# EAGLE board controlsboardfile (EAGLE 9.6.2)
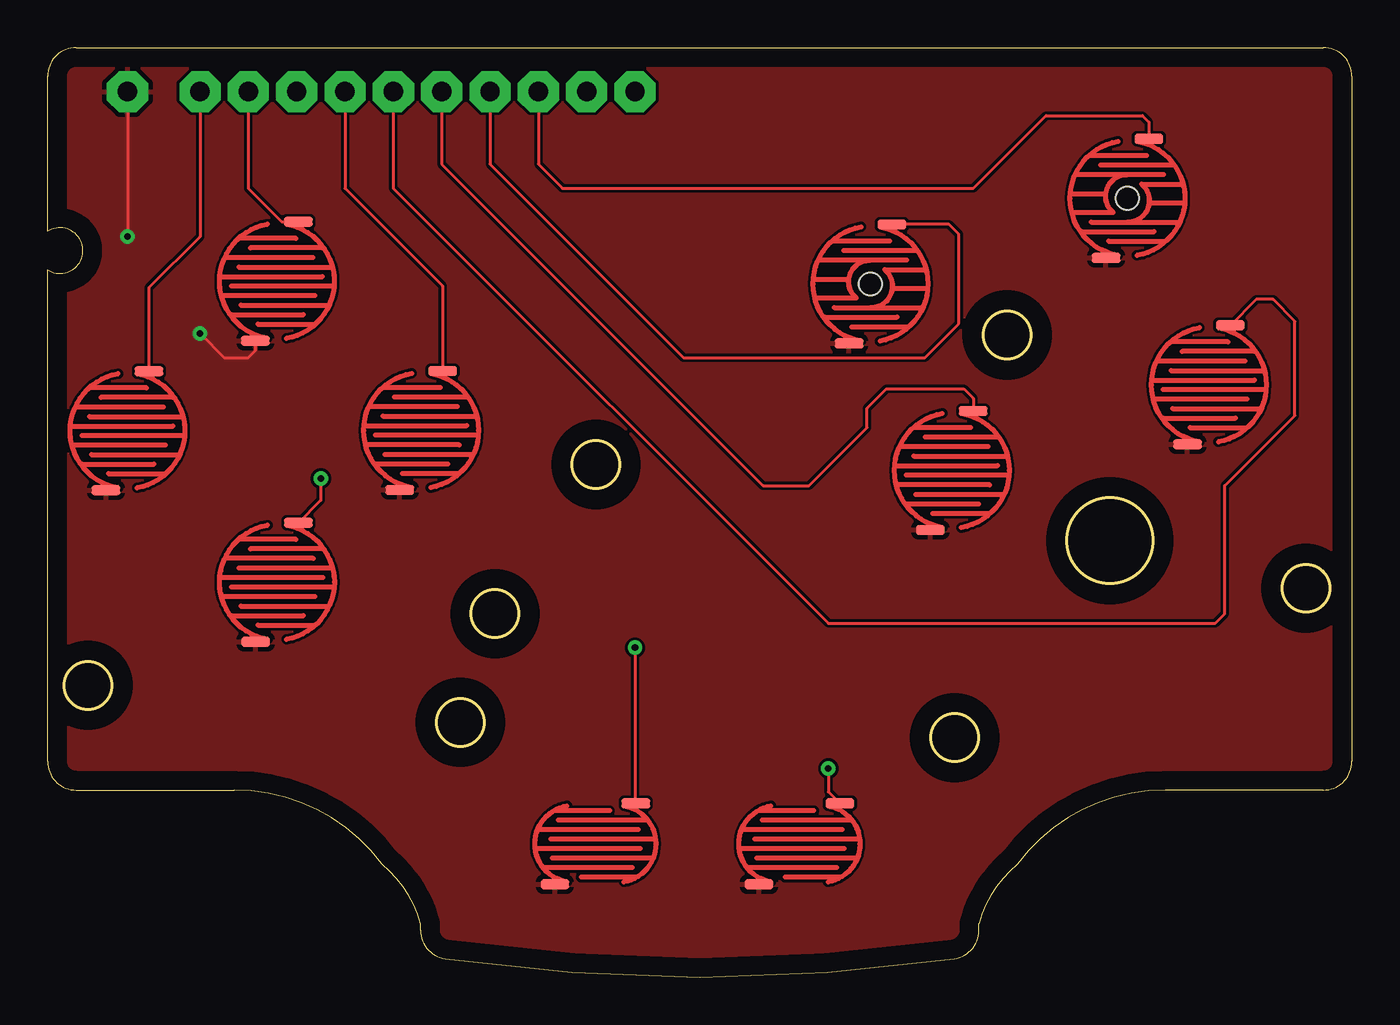
[diagram p0: board, top side]
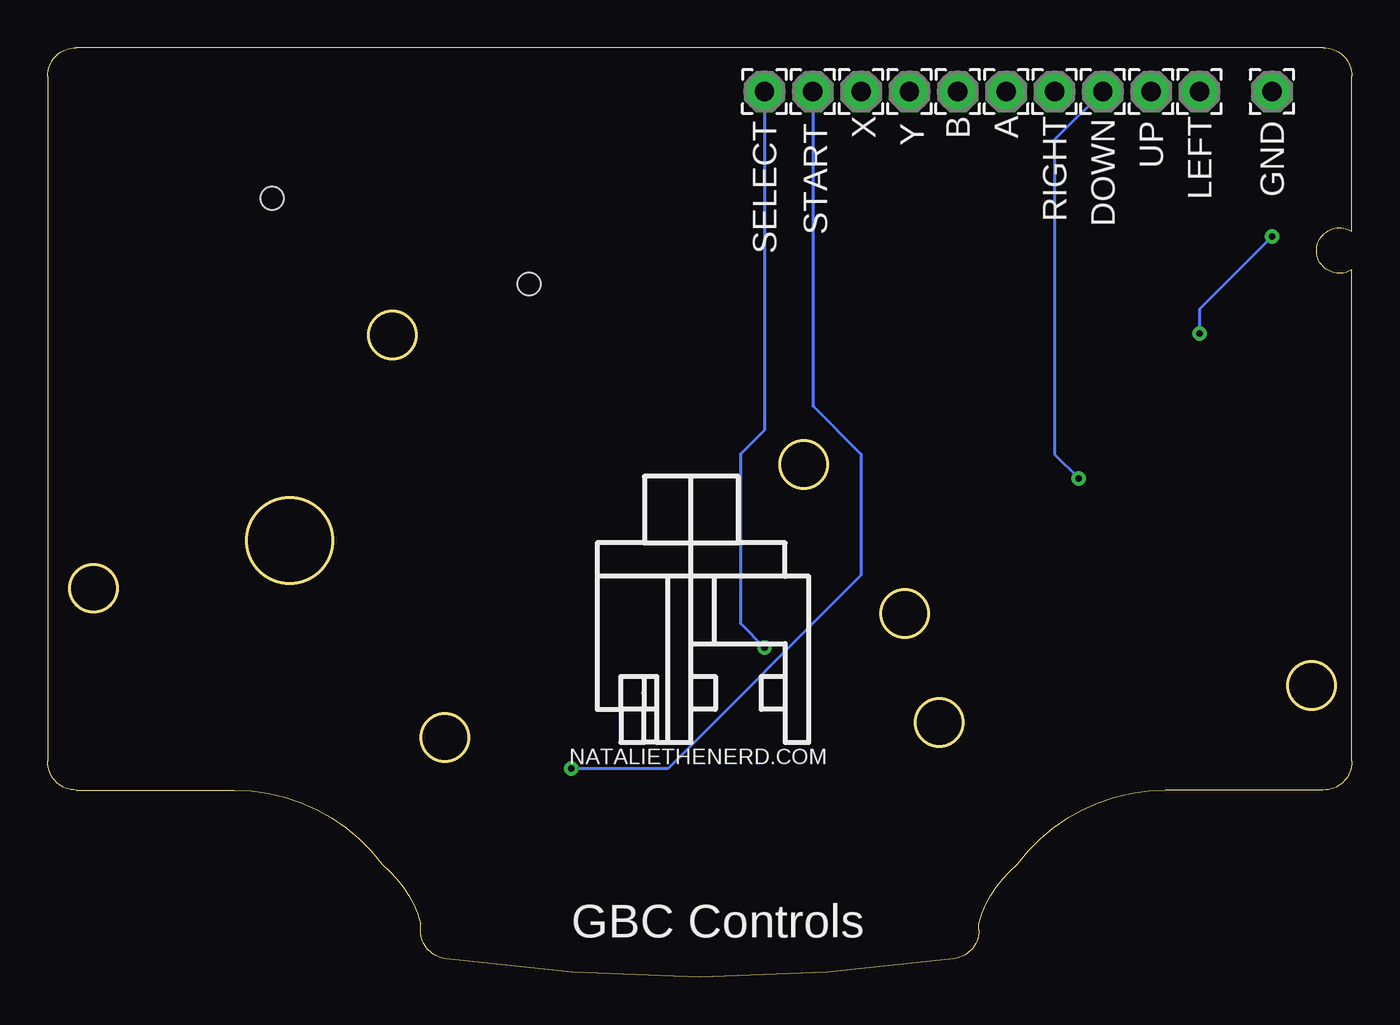
[diagram p1: board, bottom side, seen from below]

Size 68.54 x 48.82 mm. Coordinates in mm from the lower left corner, seen from the top.
Outline: 0,37.15 arc246 0,39.16 0,47.32 arc-90 1.5,48.82 67.04,48.82 arc-90 68.54,47.32 68.54,11.32 arc-90 67.04,9.82 58.73,9.82 arc53 50.96,5.93 arc34 48.94,2.8 48.94,2.45 arc-82 47.65,0.96 arc-16 20.89,0.96 arc-82 19.6,2.45 19.6,2.8 arc34 17.58,5.93 arc53 9.81,9.82 1.5,9.82 arc-90 0,11.32 0,37.15
Outline: circle at 47.67,12.57 radius 1.25
Outline: circle at 28.82,26.92 radius 1.25
Outline: circle at 2.12,15.32 radius 1.25
Outline: circle at 23.51,19.09 radius 1.25
Outline: circle at 50.42,33.72 radius 1.25
Outline: circle at 21.69,13.38 radius 1.25
Outline: circle at 55.82,22.92 radius 2.25
Outline: circle at 66.12,20.42 radius 1.25
Copper layers (1*16): Top 0.035mm / dielectric 1.5mm / Bottom 0.035mm
Design rules "default": minimum track width 6mil, minimum drill 0.35mm, track to track 6mil, track to pad 6mil, pad to pad 6mil, via to via 6mil, smd to smd 6mil, copper to edge 40mil, drill to drill 6mil, minimum pad ring 10mil, minimum via ring 8mil, stop-mask expansion 4mil, vias tented up to drill 0mil, thermal gap 10mil

## Footprints (pad centres in the part's own frame; a part is rotated, then mirrored left to right if it is on the bottom)
2,15/1,0 = drill 1.016 pad 2.159 octagon: 1 0,0
CONDUCTIVE_BUTTON = smd 1.5 x 0.508: P$ACTIVE 1.125,3.125; P$GND -1.125,-3.125
CONDUCTIVE_BUTTON_STARTSELECT = smd 1.5 x 0.508: P$ACTIVE 2.125,2.125; P$GND -2.125,-2.125
CONDUCTIVE_BUTTON_DRILL = smd 1.5 x 0.508: P$ACTIVE 1.125,3.125; P$GND -1.125,-3.125 | hole 1.2: 0,0

## Placement (x,y rotation side)
A  [2,15/1,0]  18.17,46.51 270 bottom
APAD  CONDUCTIVE_BUTTON  [CONDUCTIVE_BUTTON]  61.02,31.11 0 top
B  [2,15/1,0]  20.71,46.51 270 bottom
BPAD  CONDUCTIVE_BUTTON  [CONDUCTIVE_BUTTON]  47.52,26.61 0 top
DOWN  [2,15/1,0]  13.09,46.51 270 bottom
DOWNPAD  CONDUCTIVE_BUTTON  [CONDUCTIVE_BUTTON]  12.05,20.74 0 top
GND  [2,15/1,0]  4.2,46.51 0 bottom
LEFT  [2,15/1,0]  8.01,46.51 270 bottom
LEFTPAD  CONDUCTIVE_BUTTON  [CONDUCTIVE_BUTTON]  4.2,28.69 0 top
RIGHT  [2,15/1,0]  15.63,46.51 270 bottom
RIGHTPAD  CONDUCTIVE_BUTTON  [CONDUCTIVE_BUTTON]  19.63,28.71 0 top
SELECT  [2,15/1,0]  30.87,46.51 270 bottom
SELECTPAD  CONDUCTIVE_BUTTON_STARTSELECT  [CONDUCTIVE_BUTTON_STARTSELECT]  28.78,6.99 0 top
START  [2,15/1,0]  28.33,46.51 270 bottom
STARTPAD  CONDUCTIVE_BUTTON_STARTSELECT  [CONDUCTIVE_BUTTON_STARTSELECT]  39.51,6.99 0 top
U$1  [NEWLOGO]  39.76,12.22 0 bottom
UP  [2,15/1,0]  10.55,46.51 270 bottom
UPPAD  CONDUCTIVE_BUTTON  [CONDUCTIVE_BUTTON]  12.05,36.54 0 top
X  [2,15/1,0]  25.79,46.51 270 bottom
XPAD  CONDUCTIVE_BUTTON_DRILL  [CONDUCTIVE_BUTTON_DRILL]  56.75,40.9 0 top
Y  [2,15/1,0]  23.25,46.51 270 bottom
YPAD  CONDUCTIVE_BUTTON_DRILL  [CONDUCTIVE_BUTTON_DRILL]  43.24,36.41 0 top

## Library data of the parts
A B DOWN GND LEFT RIGHT SELECT START UP X Y = wirepad
APAD BPAD DOWNPAD LEFTPAD RIGHTPAD SELECTPAD STARTPAD UPPAD XPAD YPAD = 32teeth - Conductive Buttons
U$1 = logo

## Nets
GND: APAD.P$GND BPAD.P$GND DOWNPAD.P$GND GND.1 LEFTPAD.P$GND RIGHTPAD.P$GND SELECTPAD.P$GND STARTPAD.P$GND UPPAD.P$GND XPAD.P$GND YPAD.P$GND
N$1: LEFT.1 LEFTPAD.P$ACTIVE
N$2: DOWN.1 DOWNPAD.P$ACTIVE
N$3: RIGHT.1 RIGHTPAD.P$ACTIVE
N$4: UP.1 UPPAD.P$ACTIVE
N$5: A.1
N$6: B.1 BPAD.P$ACTIVE
N$8: Y.1 YPAD.P$ACTIVE
N$9: START.1 STARTPAD.P$ACTIVE
N$10: SELECT.1 SELECTPAD.P$ACTIVE
Y: X.1 XPAD.P$ACTIVE

## Tracks (layer width: path | path; a pad name or v marks a point on that pad's centre or on a via)
GND  (via drill 0.35)
  Top 0.152: GND.1 v4.2,38.89 | v8.01,33.81 9.28,32.54 10.55,32.54 10.93,32.92 UPPAD.P$GND
  Bottom 0.152: v4.2,38.89 8.01,35.08 v8.01,33.81
  pour Top: -4.69,51.59 -4.69,10.95 0.39,5.87 11.82,5.87 15.63,2.06 20.71,-3.02 28.33,-3.02 48.65,-3.02 51.19,-0.48 60.08,8.41 70.24,8.41 71.51,9.68 71.51,51.59
N$1
  Top 0.152: LEFT.1 8.01,38.89 5.32,36.21 LEFTPAD.P$ACTIVE
N$2  (via drill 0.35)
  Top 0.152: v14.36,26.19 14.36,25.04 DOWNPAD.P$ACTIVE
  Bottom 0.152: DOWN.1 15.63,43.97 15.63,27.46 v14.36,26.19
N$3
  Top 0.152: RIGHT.1 15.63,41.43 20.76,36.3 RIGHTPAD.P$ACTIVE
N$4
  Top 0.152: UP.1 10.55,41.43 12.31,39.67 UPPAD.P$ACTIVE
N$5
  Top 0.152: A.1 18.17,41.43 41.03,18.57 61.35,18.57 61.86,19.08 61.86,25.81 65.54,29.49 65.54,34.45 64.4,35.59 63.51,35.59 62.11,34.19
N$6
  Top 0.152: B.1 20.71,42.7 37.6,25.81 40.01,25.81 43.06,28.86 43.06,29.87 44.08,30.89 48.14,30.89 48.64,30.39 BPAD.P$ACTIVE
N$8
  Top 0.152: Y.1 23.25,42.7 33.41,32.54 46.11,32.54 47.89,34.32 47.89,39.02 47.37,39.53 YPAD.P$ACTIVE
N$9  (via drill 0.35)
  Top 0.152: v41.03,10.95 41.03,9.73 STARTPAD.P$ACTIVE
  Bottom 0.152: START.1 28.33,30 25.79,27.46 25.79,21.11 35.95,10.95 v41.03,10.95
N$10  (via drill 0.35)
  Top 0.152: v30.87,17.3 30.87,9.16 SELECTPAD.P$ACTIVE
  Bottom 0.152: SELECT.1 30.87,28.73 32.14,27.46 32.14,18.57 v30.87,17.3
Y
  Top 0.152: X.1 25.79,42.7 27.06,41.43 48.65,41.43 52.46,45.24 57.54,45.24 57.87,44.91 XPAD.P$ACTIVE

## Text on the board
bNames: GBC Controls